# EAGLE board Modul relay print (EAGLE 7.6.0), part 1 of 2
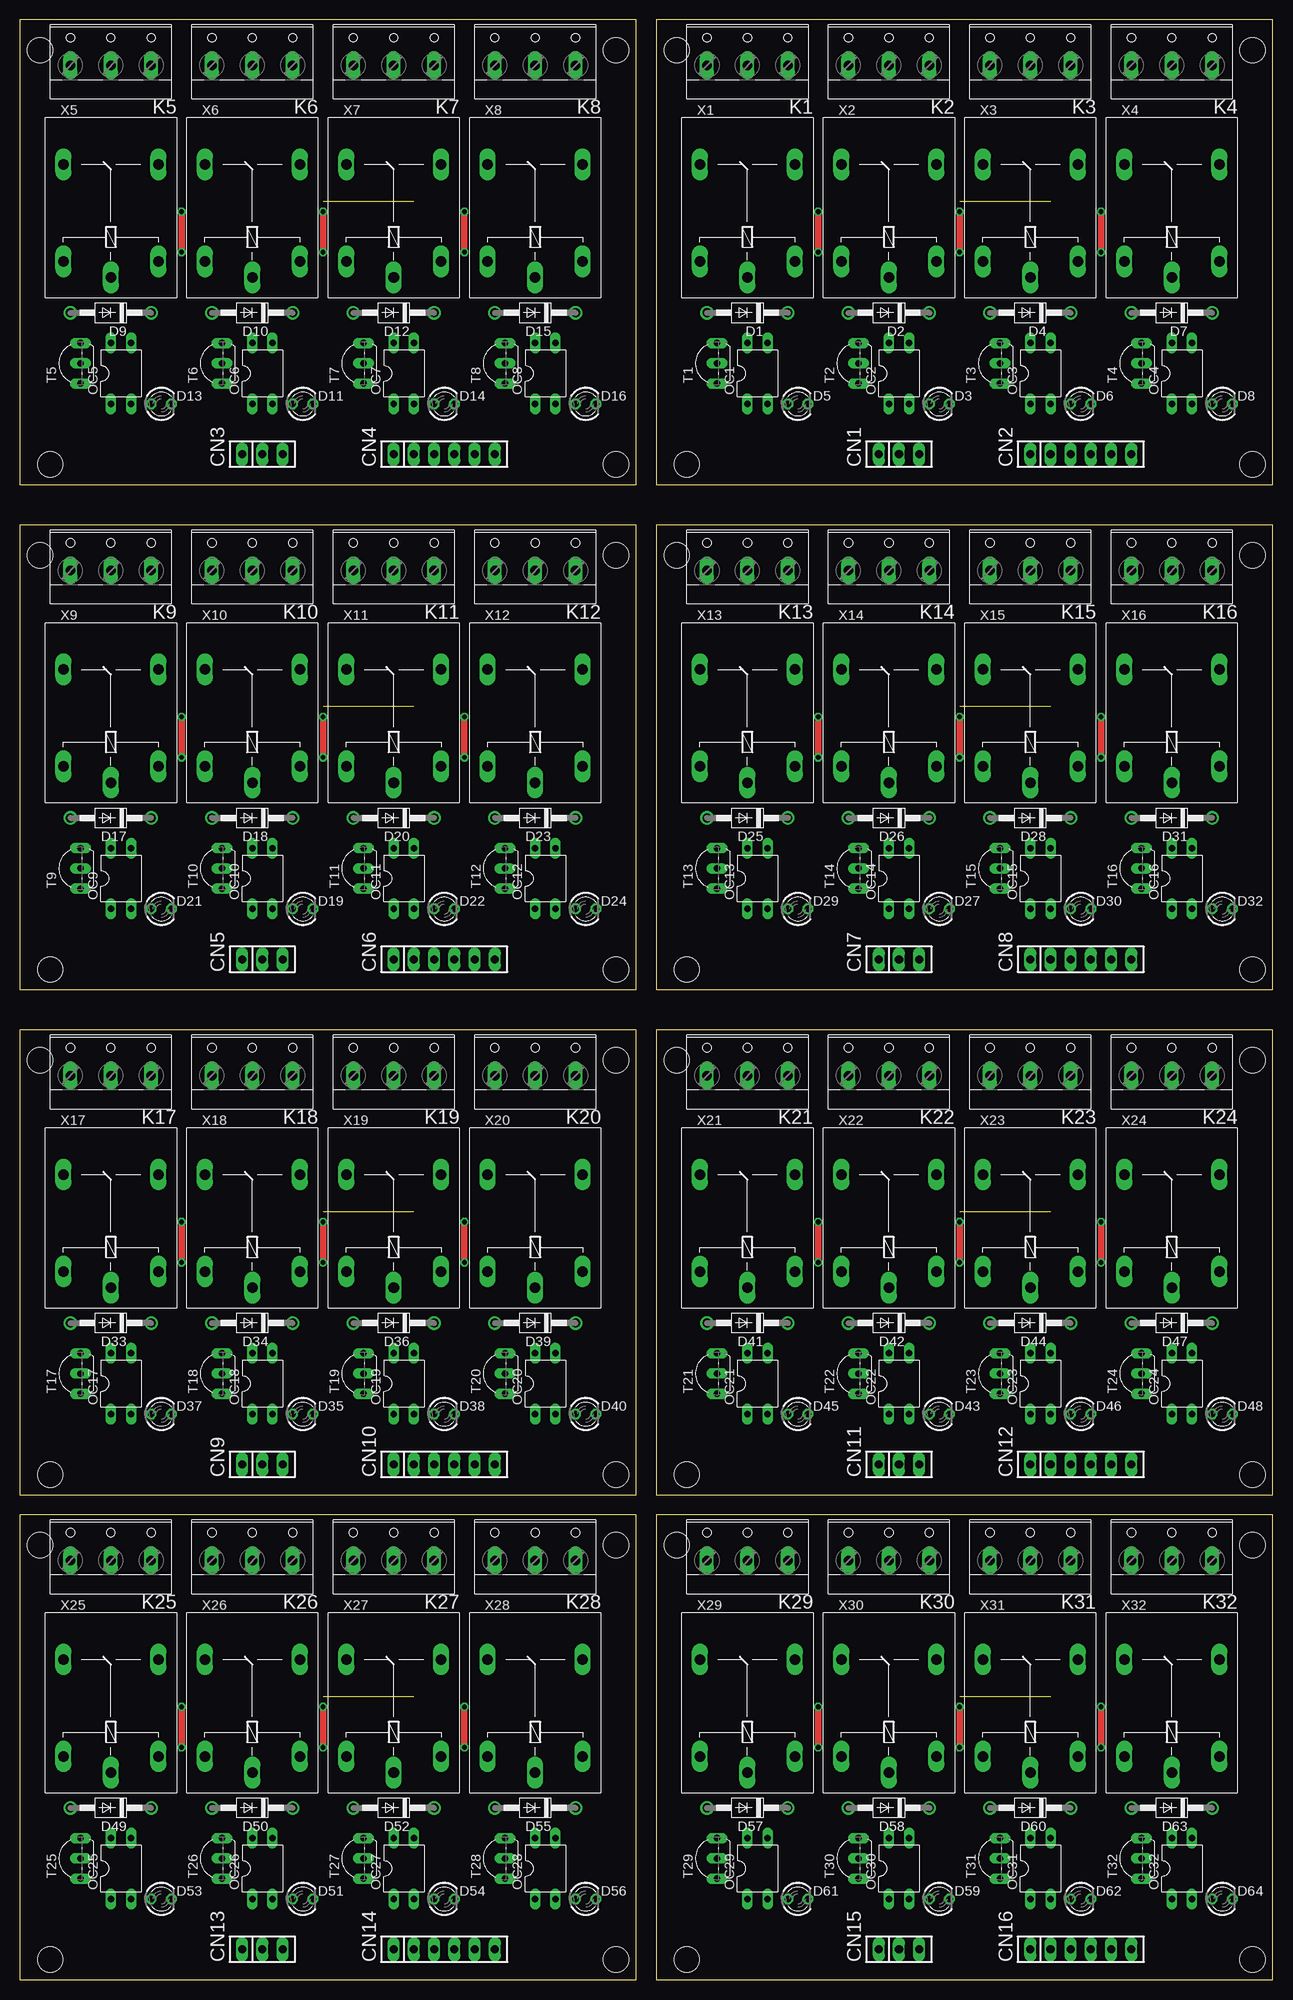
[diagram p0: board, top side]
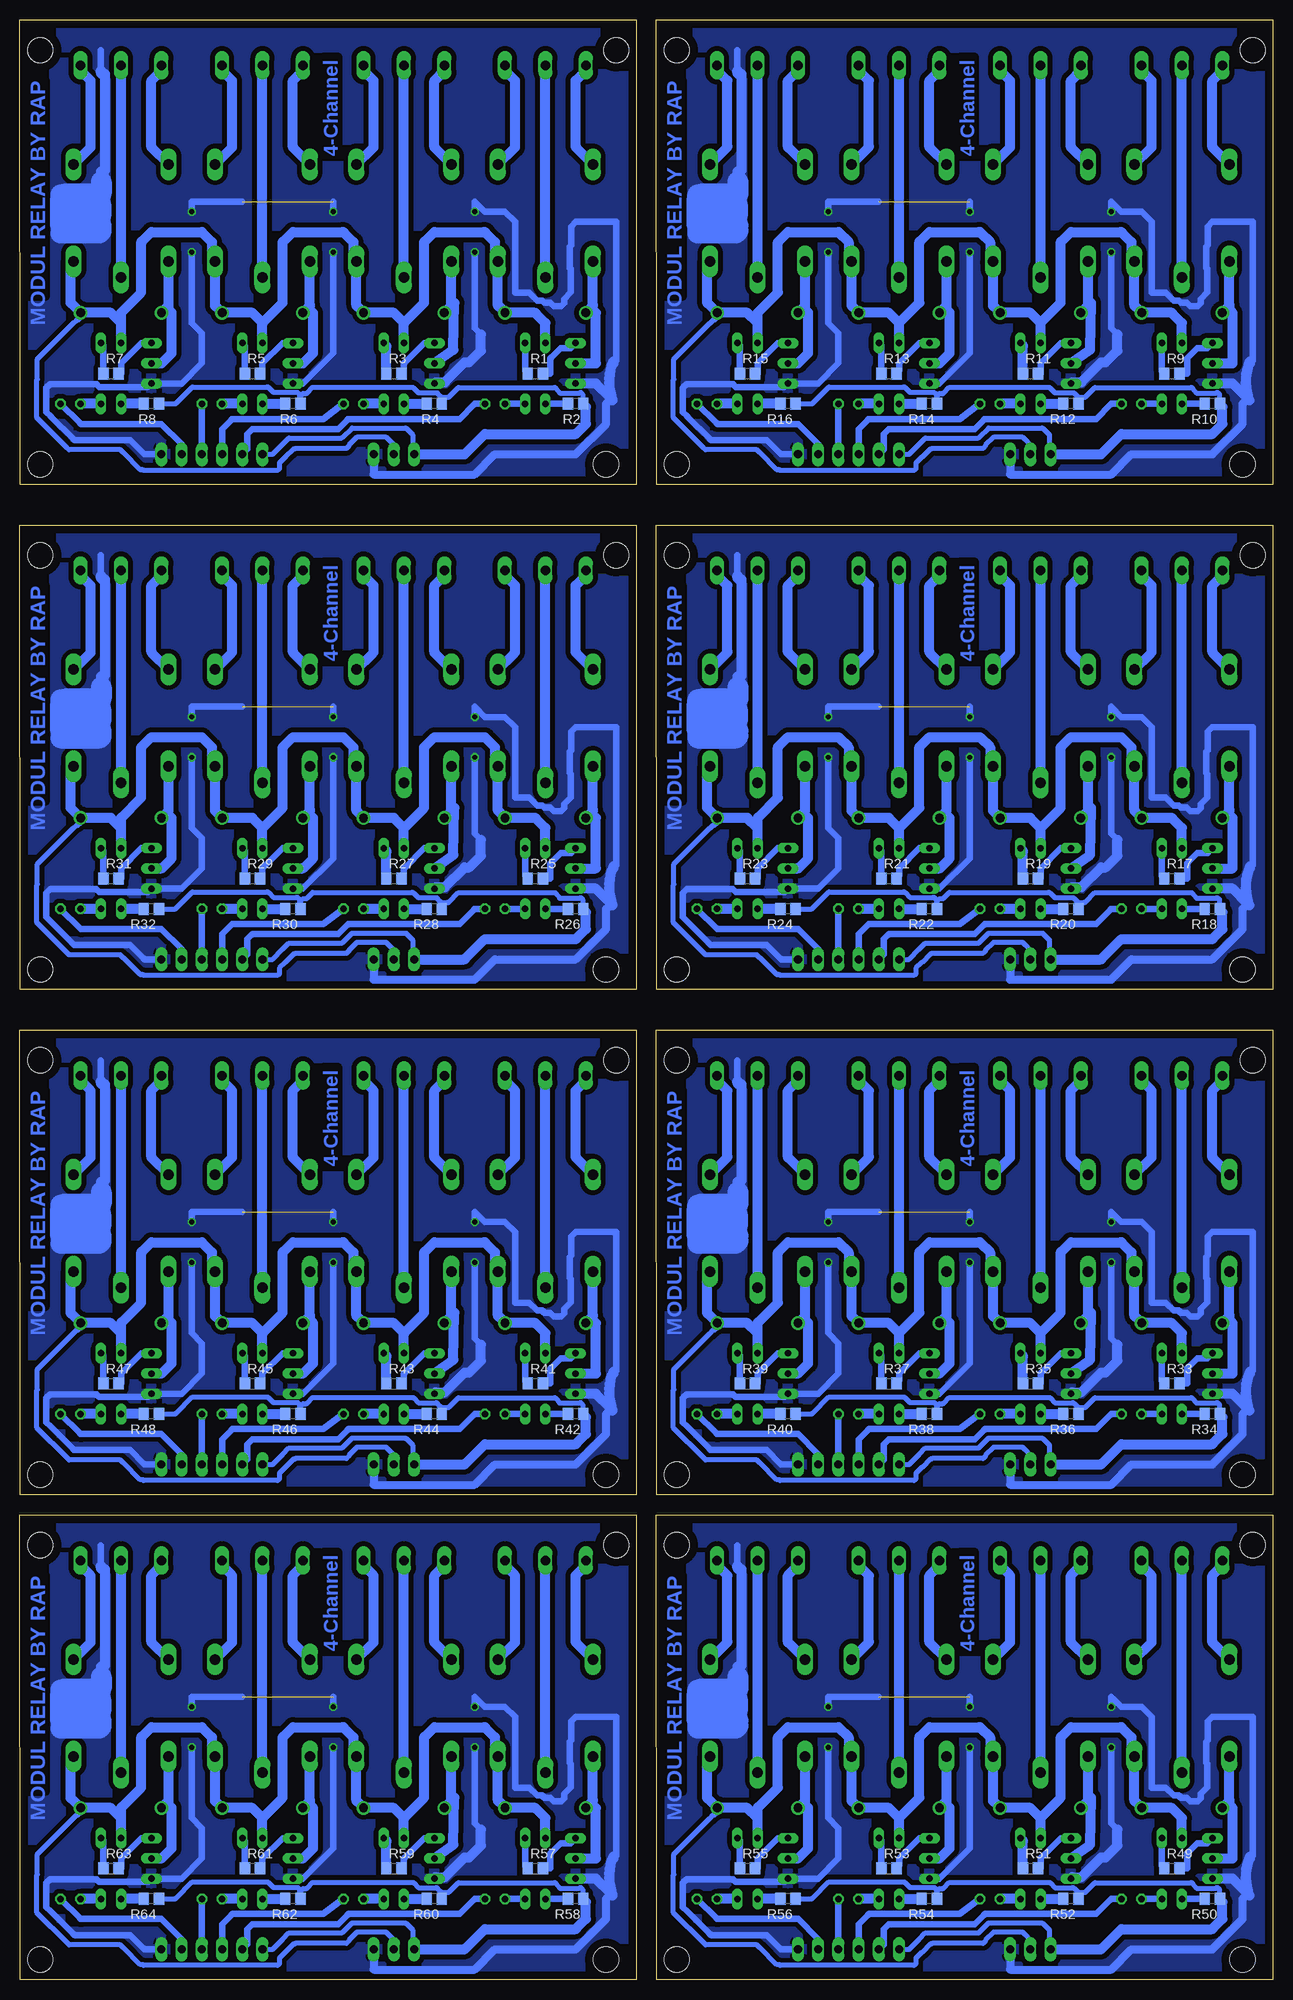
[diagram p1: board, bottom side, seen from below]

Size 157.49 x 246.38 mm. Coordinates in mm from the lower left corner, seen from the top.
Outline: 80.01,187.96 157.46,187.96 157.49,246.38 80.01,246.38 80.01,187.96
Outline: 0,187.96 77.45,187.96 77.48,246.38 0,246.38 0,187.96
Outline: 0,124.46 77.45,124.46 77.48,182.88 0,182.88 0,124.46
Outline: 80.01,124.46 157.46,124.46 157.49,182.88 80.01,182.88 80.01,124.46
Outline: 0,60.96 77.45,60.96 77.48,119.38 0,119.38 0,60.96
Outline: 80.01,60.96 157.46,60.96 157.49,119.38 80.01,119.38 80.01,60.96
Outline: 0,0 77.45,0 77.48,58.42 0,58.42 0,0
Outline: 80.01,0 157.46,0 157.49,58.42 80.01,58.42 80.01,0
Copper layers (1*16): Top 0.035mm / dielectric 1.5mm / Bottom 0.035mm
Design rules "default": minimum track width 10mil, minimum drill 24mil, track to track 8mil, track to pad 8mil, pad to pad 8mil, via to via 8mil, smd to smd 8mil, copper to edge 40mil, drill to drill 8mil, minimum pad ring 10mil, minimum via ring 8mil, stop-mask expansion 4mil, vias tented up to drill 0mil, thermal gap 10mil
Holes 3.2 mm at 83.82,190.5 154.94,190.5 82.55,242.57 154.94,242.57 3.81,190.5 74.93,190.5 2.54,242.57 74.93,242.57 3.81,127 74.93,127 2.54,179.07 74.93,179.07 83.82,127 154.94,127 82.55,179.07 154.94,179.07 3.81,63.5 74.93,63.5 2.54,115.57 74.93,115.57 83.82,63.5 154.94,63.5 82.55,115.57 154.94,115.57 3.81,2.54 74.93,2.54 2.54,54.61 74.93,54.61 83.82,2.54 154.94,2.54 82.55,54.61 154.94,54.61

## Footprints (pad centres in the part's own frame; a part is rotated, then mirrored left to right if it is on the bottom)
SIP-100-3V = drill 1.016 long: 1 -2.54,0; 2 0,0; 3 2.54,0
SIP-100-6V = drill 1.016 long: 1 -6.35,0; 2 -3.81,0; 3 -1.27,0; 4 1.27,0; 5 3.81,0; 6 6.35,0
DO41-10 = drill 1.118: A 5.08,0; C -5.08,0
LED3MM = drill 0.813 octagon: A -1.27,0; K 1.27,0
G5LE = drill 1.321 long: 1 -7.493,-5.969; 2 -7.493,5.969; O 4.699,5.969; P -9.525,0; S 4.699,-5.969
DIL04 = drill 0.813 long: 1 -1.27,-3.81; 2 1.27,-3.81; 3 1.27,3.81; 4 -1.27,3.81
R0805 = smd 1.3 x 1.5: 1 -0.95,0; 2 0.95,0
TO92-ECB = drill 0.813 long: B 2.54,0; C 0,0; E -2.54,0
W237-3E = drill 1.194 long: 1 -5.08,-0.635; 2 0,-0.635; 3 5.08,-0.635

## Placement (x,y rotation side)
CN1  [SIP-100-3V]  110.49,191.77 0 top
CN2  [SIP-100-6V]  133.35,191.77 0 top
CN3  [SIP-100-3V]  30.48,191.77 0 top
CN4  [SIP-100-6V]  53.34,191.77 0 top
CN5  [SIP-100-3V]  30.48,128.27 0 top
CN6  [SIP-100-6V]  53.34,128.27 0 top
CN7  [SIP-100-3V]  110.49,128.27 0 top
CN8  [SIP-100-6V]  133.35,128.27 0 top
CN9  [SIP-100-3V]  30.48,64.77 0 top
CN10  [SIP-100-6V]  53.34,64.77 0 top
CN11  [SIP-100-3V]  110.49,64.77 0 top
CN12  [SIP-100-6V]  133.35,64.77 0 top
CN13  [SIP-100-3V]  30.48,3.81 0 top
CN14  [SIP-100-6V]  53.34,3.81 0 top
CN15  [SIP-100-3V]  110.49,3.81 0 top
CN16  [SIP-100-6V]  133.35,3.81 0 top
D1  1N4004  [DO41-10]  91.44,209.55 180 top
D2  1N4004  [DO41-10]  109.22,209.55 180 top
D3  [LED3MM]  115.57,198.12 0 top
D4  1N4004  [DO41-10]  127,209.55 180 top
D5  [LED3MM]  97.79,198.12 0 top
D6  [LED3MM]  133.35,198.12 0 top
D7  1N4004  [DO41-10]  144.78,209.55 180 top
D8  [LED3MM]  151.13,198.12 0 top
D9  1N4004  [DO41-10]  11.43,209.55 180 top
D10  1N4004  [DO41-10]  29.21,209.55 180 top
D11  [LED3MM]  35.56,198.12 0 top
D12  1N4004  [DO41-10]  46.99,209.55 180 top
D13  [LED3MM]  17.78,198.12 0 top
D14  [LED3MM]  53.34,198.12 0 top
D15  1N4004  [DO41-10]  64.77,209.55 180 top
D16  [LED3MM]  71.12,198.12 0 top
D17  1N4004  [DO41-10]  11.43,146.05 180 top
D18  1N4004  [DO41-10]  29.21,146.05 180 top
D19  [LED3MM]  35.56,134.62 0 top
D20  1N4004  [DO41-10]  46.99,146.05 180 top
D21  [LED3MM]  17.78,134.62 0 top
D22  [LED3MM]  53.34,134.62 0 top
D23  1N4004  [DO41-10]  64.77,146.05 180 top
D24  [LED3MM]  71.12,134.62 0 top
D25  1N4004  [DO41-10]  91.44,146.05 180 top
D26  1N4004  [DO41-10]  109.22,146.05 180 top
D27  [LED3MM]  115.57,134.62 0 top
D28  1N4004  [DO41-10]  127,146.05 180 top
D29  [LED3MM]  97.79,134.62 0 top
D30  [LED3MM]  133.35,134.62 0 top
D31  1N4004  [DO41-10]  144.78,146.05 180 top
D32  [LED3MM]  151.13,134.62 0 top
D33  1N4004  [DO41-10]  11.43,82.55 180 top
D34  1N4004  [DO41-10]  29.21,82.55 180 top
D35  [LED3MM]  35.56,71.12 0 top
D36  1N4004  [DO41-10]  46.99,82.55 180 top
D37  [LED3MM]  17.78,71.12 0 top
D38  [LED3MM]  53.34,71.12 0 top
D39  1N4004  [DO41-10]  64.77,82.55 180 top
D40  [LED3MM]  71.12,71.12 0 top
D41  1N4004  [DO41-10]  91.44,82.55 180 top
D42  1N4004  [DO41-10]  109.22,82.55 180 top
D43  [LED3MM]  115.57,71.12 0 top
D44  1N4004  [DO41-10]  127,82.55 180 top
D45  [LED3MM]  97.79,71.12 0 top
D46  [LED3MM]  133.35,71.12 0 top
D47  1N4004  [DO41-10]  144.78,82.55 180 top
D48  [LED3MM]  151.13,71.12 0 top
D49  1N4004  [DO41-10]  11.43,21.59 180 top
D50  1N4004  [DO41-10]  29.21,21.59 180 top
D51  [LED3MM]  35.56,10.16 0 top
D52  1N4004  [DO41-10]  46.99,21.59 180 top
D53  [LED3MM]  17.78,10.16 0 top
D54  [LED3MM]  53.34,10.16 0 top
D55  1N4004  [DO41-10]  64.77,21.59 180 top
D56  [LED3MM]  71.12,10.16 0 top
D57  1N4004  [DO41-10]  91.44,21.59 180 top
D58  1N4004  [DO41-10]  109.22,21.59 180 top
D59  [LED3MM]  115.57,10.16 0 top
D60  1N4004  [DO41-10]  127,21.59 180 top
D61  [LED3MM]  97.79,10.16 0 top
D62  [LED3MM]  133.35,10.16 0 top
D63  1N4004  [DO41-10]  144.78,21.59 180 top
D64  [LED3MM]  151.13,10.16 0 top
K1  G5L  [G5LE]  91.44,223.52 90 top
K2  G5L  [G5LE]  109.22,223.52 90 top
K3  G5L  [G5LE]  127,223.52 90 top
K4  G5L  [G5LE]  144.78,223.52 90 top
K5  G5L  [G5LE]  11.43,223.52 90 top
K6  G5L  [G5LE]  29.21,223.52 90 top
K7  G5L  [G5LE]  46.99,223.52 90 top
K8  G5L  [G5LE]  64.77,223.52 90 top
K9  G5L  [G5LE]  11.43,160.02 90 top
K10  G5L  [G5LE]  29.21,160.02 90 top
K11  G5L  [G5LE]  46.99,160.02 90 top
K12  G5L  [G5LE]  64.77,160.02 90 top
K13  G5L  [G5LE]  91.44,160.02 90 top
K14  G5L  [G5LE]  109.22,160.02 90 top
K15  G5L  [G5LE]  127,160.02 90 top
K16  G5L  [G5LE]  144.78,160.02 90 top
K17  G5L  [G5LE]  11.43,96.52 90 top
K18  G5L  [G5LE]  29.21,96.52 90 top
K19  G5L  [G5LE]  46.99,96.52 90 top
K20  G5L  [G5LE]  64.77,96.52 90 top
K21  G5L  [G5LE]  91.44,96.52 90 top
K22  G5L  [G5LE]  109.22,96.52 90 top
K23  G5L  [G5LE]  127,96.52 90 top
K24  G5L  [G5LE]  144.78,96.52 90 top
K25  G5L  [G5LE]  11.43,35.56 90 top
K26  G5L  [G5LE]  29.21,35.56 90 top
K27  G5L  [G5LE]  46.99,35.56 90 top
K28  G5L  [G5LE]  64.77,35.56 90 top
K29  G5L  [G5LE]  91.44,35.56 90 top
K30  G5L  [G5LE]  109.22,35.56 90 top
K31  G5L  [G5LE]  127,35.56 90 top
K32  G5L  [G5LE]  144.78,35.56 90 top
OC1  [DIL04]  92.71,201.93 0 top
OC2  [DIL04]  110.49,201.93 0 top
OC3  [DIL04]  128.27,201.93 0 top
OC4  [DIL04]  146.05,201.93 0 top
OC5  [DIL04]  12.7,201.93 0 top
OC6  [DIL04]  30.48,201.93 0 top
OC7  [DIL04]  48.26,201.93 0 top
OC8  [DIL04]  66.04,201.93 0 top
OC9  [DIL04]  12.7,138.43 0 top
OC10  [DIL04]  30.48,138.43 0 top
OC11  [DIL04]  48.26,138.43 0 top
OC12  [DIL04]  66.04,138.43 0 top
OC13  [DIL04]  92.71,138.43 0 top
OC14  [DIL04]  110.49,138.43 0 top
OC15  [DIL04]  128.27,138.43 0 top
OC16  [DIL04]  146.05,138.43 0 top
OC17  [DIL04]  12.7,74.93 0 top
OC18  [DIL04]  30.48,74.93 0 top
OC19  [DIL04]  48.26,74.93 0 top
OC20  [DIL04]  66.04,74.93 0 top
OC21  [DIL04]  92.71,74.93 0 top
OC22  [DIL04]  110.49,74.93 0 top
OC23  [DIL04]  128.27,74.93 0 top
OC24  [DIL04]  146.05,74.93 0 top
OC25  [DIL04]  12.7,13.97 0 top
OC26  [DIL04]  30.48,13.97 0 top
OC27  [DIL04]  48.26,13.97 0 top
OC28  [DIL04]  66.04,13.97 0 top
OC29  [DIL04]  92.71,13.97 0 top
OC30  [DIL04]  110.49,13.97 0 top
OC31  [DIL04]  128.27,13.97 0 top
OC32  [DIL04]  146.05,13.97 0 top
R1  [R0805]  92.71,201.93 0 bottom
R2  [R0805]  87.63,198.12 180 bottom
R3  [R0805]  110.49,201.93 0 bottom
R4  [R0805]  105.41,198.12 180 bottom
R5  [R0805]  128.27,201.93 0 bottom
R6  [R0805]  123.19,198.12 180 bottom
R7  [R0805]  146.05,201.93 0 bottom
R8  [R0805]  140.97,198.12 180 bottom
R9  [R0805]  12.7,201.93 0 bottom
R10  [R0805]  7.62,198.12 180 bottom
R11  [R0805]  30.48,201.93 0 bottom
R12  [R0805]  25.4,198.12 180 bottom
R13  [R0805]  48.26,201.93 0 bottom
R14  [R0805]  43.18,198.12 180 bottom
R15  [R0805]  66.04,201.93 0 bottom
R16  [R0805]  60.96,198.12 180 bottom
R17  [R0805]  12.7,138.43 0 bottom
R18  [R0805]  7.62,134.62 180 bottom
R19  [R0805]  30.48,138.43 0 bottom
R20  [R0805]  25.4,134.62 180 bottom
R21  [R0805]  48.26,138.43 0 bottom
R22  [R0805]  43.18,134.62 180 bottom
R23  [R0805]  66.04,138.43 0 bottom
R24  [R0805]  60.96,134.62 180 bottom
R25  [R0805]  92.71,138.43 0 bottom
R26  [R0805]  87.63,134.62 180 bottom
R27  [R0805]  110.49,138.43 0 bottom
R28  [R0805]  105.41,134.62 180 bottom
R29  [R0805]  128.27,138.43 0 bottom
R30  [R0805]  123.19,134.62 180 bottom
R31  [R0805]  146.05,138.43 0 bottom
R32  [R0805]  140.97,134.62 180 bottom
R33  [R0805]  12.7,74.93 0 bottom
R34  [R0805]  7.62,71.12 180 bottom
R35  [R0805]  30.48,74.93 0 bottom
R36  [R0805]  25.4,71.12 180 bottom
R37  [R0805]  48.26,74.93 0 bottom
R38  [R0805]  43.18,71.12 180 bottom
R39  [R0805]  66.04,74.93 0 bottom
R40  [R0805]  60.96,71.12 180 bottom
R41  [R0805]  92.71,74.93 0 bottom
R42  [R0805]  87.63,71.12 180 bottom
R43  [R0805]  110.49,74.93 0 bottom
R44  [R0805]  105.41,71.12 180 bottom
R45  [R0805]  128.27,74.93 0 bottom
R46  [R0805]  123.19,71.12 180 bottom
R47  [R0805]  146.05,74.93 0 bottom
R48  [R0805]  140.97,71.12 180 bottom
R49  [R0805]  12.7,13.97 0 bottom
R50  [R0805]  7.62,10.16 180 bottom
R51  [R0805]  30.48,13.97 0 bottom
R52  [R0805]  25.4,10.16 180 bottom
R53  [R0805]  48.26,13.97 0 bottom
R54  [R0805]  43.18,10.16 180 bottom
R55  [R0805]  66.04,13.97 0 bottom
R56  [R0805]  60.96,10.16 180 bottom
R57  [R0805]  92.71,13.97 0 bottom
R58  [R0805]  87.63,10.16 180 bottom
R59  [R0805]  110.49,13.97 0 bottom
R60  [R0805]  105.41,10.16 180 bottom
R61  [R0805]  128.27,13.97 0 bottom
R62  [R0805]  123.19,10.16 180 bottom
R63  [R0805]  146.05,13.97 0 bottom
R64  [R0805]  140.97,10.16 180 bottom
T1  [TO92-ECB]  87.63,203.2 90 top
T2  [TO92-ECB]  105.41,203.2 90 top
T3  [TO92-ECB]  123.19,203.2 90 top
T4  [TO92-ECB]  140.97,203.2 90 top
T5  [TO92-ECB]  7.62,203.2 90 top
T6  [TO92-ECB]  25.4,203.2 90 top
T7  [TO92-ECB]  43.18,203.2 90 top
T8  [TO92-ECB]  60.96,203.2 90 top
T9  [TO92-ECB]  7.62,139.7 90 top
T10  [TO92-ECB]  25.4,139.7 90 top
T11  [TO92-ECB]  43.18,139.7 90 top
T12  [TO92-ECB]  60.96,139.7 90 top
T13  [TO92-ECB]  87.63,139.7 90 top
T14  [TO92-ECB]  105.41,139.7 90 top
T15  [TO92-ECB]  123.19,139.7 90 top
T16  [TO92-ECB]  140.97,139.7 90 top
T17  [TO92-ECB]  7.62,76.2 90 top
T18  [TO92-ECB]  25.4,76.2 90 top
T19  [TO92-ECB]  43.18,76.2 90 top
T20  [TO92-ECB]  60.96,76.2 90 top
T21  [TO92-ECB]  87.63,76.2 90 top
T22  [TO92-ECB]  105.41,76.2 90 top
T23  [TO92-ECB]  123.19,76.2 90 top
T24  [TO92-ECB]  140.97,76.2 90 top
T25  [TO92-ECB]  7.62,15.24 90 top
T26  [TO92-ECB]  25.4,15.24 90 top
T27  [TO92-ECB]  43.18,15.24 90 top
T28  [TO92-ECB]  60.96,15.24 90 top
T29  [TO92-ECB]  87.63,15.24 90 top
T30  [TO92-ECB]  105.41,15.24 90 top
T31  [TO92-ECB]  123.19,15.24 90 top
T32  [TO92-ECB]  140.97,15.24 90 top
X1  [W237-3E]  91.44,241.3 0 top
X2  [W237-3E]  109.22,241.3 0 top
X3  [W237-3E]  127,241.3 0 top
X4  [W237-3E]  144.78,241.3 0 top
X5  [W237-3E]  11.43,241.3 0 top
X6  [W237-3E]  29.21,241.3 0 top
X7  [W237-3E]  46.99,241.3 0 top
X8  [W237-3E]  64.77,241.3 0 top
X9  [W237-3E]  11.43,177.8 0 top
X10  [W237-3E]  29.21,177.8 0 top
X11  [W237-3E]  46.99,177.8 0 top
X12  [W237-3E]  64.77,177.8 0 top
X13  [W237-3E]  91.44,177.8 0 top
X14  [W237-3E]  109.22,177.8 0 top
X15  [W237-3E]  127,177.8 0 top
X16  [W237-3E]  144.78,177.8 0 top
X17  [W237-3E]  11.43,114.3 0 top
X18  [W237-3E]  29.21,114.3 0 top
X19  [W237-3E]  46.99,114.3 0 top
X20  [W237-3E]  64.77,114.3 0 top
X21  [W237-3E]  91.44,114.3 0 top
X22  [W237-3E]  109.22,114.3 0 top
X23  [W237-3E]  127,114.3 0 top
X24  [W237-3E]  144.78,114.3 0 top
X25  [W237-3E]  11.43,53.34 0 top
X26  [W237-3E]  29.21,53.34 0 top
X27  [W237-3E]  46.99,53.34 0 top
X28  [W237-3E]  64.77,53.34 0 top
X29  [W237-3E]  91.44,53.34 0 top
X30  [W237-3E]  109.22,53.34 0 top
X31  [W237-3E]  127,53.34 0 top
X32  [W237-3E]  144.78,53.34 0 top

## Library data of the parts
CN1-CN16 = con-hdrs40
D1 D2 D4 D7 D9 D10 D12 D15 D17 D18 D20 D23 D25 D26 D28 D31 D33 D34 D36 D39 D41 D42 D44 D47 D49 D50 D52 D55 D57 D58 D60 D63 = diode
D3 D5 D6 D8 D11 D13 D14 D16 D19 D21 D22 D24 D27 D29 D30 D32 D35 D37 D38 D40 D43 D45 D46 D48 D51 D53 D54 D56 D59 D61 D62 D64 = led
K1-K32 = relay; OC_FARNELL: unknown; OC_NEWARK: unknown
OC1-OC32 = optocoupler
R1-R64 = rcl
T1-T32 = transistor
X1-X32 = con-wago-508; OC_FARNELL: unknown; OC_NEWARK: unknown

## Nets
COM: K1.P X1.2
COM1: K5.P X5.2
COM2: K9.P X9.2
COM3: K13.P X13.2
COM4: K17.P X17.2
COM5: K21.P X21.2
COM6: K25.P X25.2
COM7: K29.P X29.2
COM_1: K2.P X2.2
COM_2: K3.P X3.2
COM_3: K4.P X4.2
COM_4: K6.P X6.2
COM_5: K7.P X7.2
COM_6: K8.P X8.2
COM_7: K10.P X10.2
COM_8: K11.P X11.2
COM_9: K12.P X12.2
COM_10: K14.P X14.2
COM_11: K15.P X15.2
COM_12: K16.P X16.2
COM_13: K18.P X18.2
COM_14: K19.P X19.2
COM_15: K20.P X20.2
COM_16: K22.P X22.2
COM_17: K23.P X23.2
COM_18: K24.P X24.2
COM_19: K26.P X26.2
COM_20: K27.P X27.2
COM_21: K28.P X28.2
COM_22: K30.P X30.2
COM_23: K31.P X31.2
COM_24: K32.P X32.2
GND: CN1.3 CN2.6 T1.E T2.E T3.E T4.E
GND1: CN3.3 CN4.6 T5.E T6.E T7.E T8.E
GND2: CN5.3 CN6.6 T9.E T10.E T11.E T12.E
GND3: CN7.3 CN8.6 T13.E T14.E T15.E T16.E
GND4: CN9.3 CN10.6 T17.E T18.E T19.E T20.E
GND5: CN11.3 CN12.6 T21.E T22.E T23.E T24.E
GND6: CN13.3 CN14.6 T25.E T26.E T27.E T28.E
GND7: CN15.3 CN16.6 T29.E T30.E T31.E T32.E
IN-1: CN2.2 D5.K
IN-2: CN2.3 D3.K
IN-3: CN2.4 D6.K
IN-4: CN2.5 D8.K
IN-5: CN4.2 D13.K
IN-6: CN4.3 D11.K
IN-7: CN4.4 D14.K
IN-8: CN4.5 D16.K
IN-9: CN6.2 D21.K
IN-10: CN6.3 D19.K
IN-11: CN6.4 D22.K
IN-12: CN6.5 D24.K
IN-13: CN8.2 D29.K
IN-14: CN8.3 D27.K
IN-15: CN8.4 D30.K
IN-16: CN8.5 D32.K
IN-17: CN10.2 D37.K
IN-18: CN10.3 D35.K
IN-19: CN10.4 D38.K
IN-20: CN10.5 D40.K
IN-21: CN12.2 D45.K
IN-22: CN12.3 D43.K
IN-23: CN12.4 D46.K
IN-24: CN12.5 D48.K
IN-25: CN14.2 D53.K
IN-26: CN14.3 D51.K
IN-27: CN14.4 D54.K
IN-28: CN14.5 D56.K
IN-29: CN16.2 D61.K
IN-30: CN16.3 D59.K
IN-31: CN16.4 D62.K
IN-32: CN16.5 D64.K
JD-VCC: CN1.2 D1.C D2.C D4.C D7.C K1.1 K2.1 K3.1 K4.1 OC1.4 OC2.4 OC3.4 OC4.4
JD-VCC1: CN3.2 D9.C D10.C D12.C D15.C K5.1 K6.1 K7.1 K8.1 OC5.4 OC6.4 OC7.4 OC8.4
JD-VCC2: CN5.2 D17.C D18.C D20.C D23.C K9.1 K10.1 K11.1 K12.1 OC9.4 OC10.4 OC11.4 OC12.4
JD-VCC3: CN7.2 D25.C D26.C D28.C D31.C K13.1 K14.1 K15.1 K16.1 OC13.4 OC14.4 OC15.4 OC16.4
JD-VCC4: CN9.2 D33.C D34.C D36.C D39.C K17.1 K18.1 K19.1 K20.1 OC17.4 OC18.4 OC19.4 OC20.4
JD-VCC5: CN11.2 D41.C D42.C D44.C D47.C K21.1 K22.1 K23.1 K24.1 OC21.4 OC22.4 OC23.4 OC24.4
JD-VCC6: CN13.2 D49.C D50.C D52.C D55.C K25.1 K26.1 K27.1 K28.1 OC25.4 OC26.4 OC27.4 OC28.4
JD-VCC7: CN15.2 D57.C D58.C D60.C D63.C K29.1 K30.1 K31.1 K32.1 OC29.4 OC30.4 OC31.4 OC32.4
N$1: D2.A K2.2 T2.C
N$2: D1.A K1.2 T1.C
N$3: OC1.1 R2.2
N$4: R3.2 T2.B
N$5: OC2.3 R3.1
N$6: D3.A OC2.2
N$7: OC2.1 R4.2
N$8: D4.A K3.2 T3.C
N$9: R1.2 T1.B
N$10: OC1.3 R1.1
N$11: D5.A OC1.2
N$12: R5.2 T3.B
N$13: OC3.3 R5.1
N$14: D6.A OC3.2
N$15: OC3.1 R6.2
N$16: D7.A K4.2 T4.C
N$17: R7.2 T4.B
N$18: OC4.3 R7.1
N$19: D8.A OC4.2
N$20: OC4.1 R8.2
N$21: D9.A K5.2 T5.C
N$22: R9.2 T5.B
N$23: OC5.3 R9.1
N$24: D13.A OC5.2
N$25: OC5.1 R10.2
N$26: D10.A K6.2 T6.C
N$27: R11.2 T6.B
N$28: OC6.3 R11.1
N$29: D11.A OC6.2
N$30: OC6.1 R12.2
N$31: D12.A K7.2 T7.C
N$32: R13.2 T7.B
N$33: OC7.3 R13.1
N$34: D14.A OC7.2
N$35: OC7.1 R14.2
N$36: D15.A K8.2 T8.C
N$37: R15.2 T8.B
N$38: OC8.3 R15.1
N$39: D16.A OC8.2
N$40: OC8.1 R16.2
N$41: D17.A K9.2 T9.C
N$42: R17.2 T9.B
N$43: OC9.3 R17.1
N$44: D21.A OC9.2
N$45: OC9.1 R18.2
N$46: D18.A K10.2 T10.C
N$47: R19.2 T10.B
N$48: OC10.3 R19.1
N$49: D19.A OC10.2
N$50: OC10.1 R20.2
N$51: D20.A K11.2 T11.C
N$52: R21.2 T11.B
N$53: OC11.3 R21.1
N$54: D22.A OC11.2
N$55: OC11.1 R22.2
N$56: D23.A K12.2 T12.C
N$57: R23.2 T12.B
N$58: OC12.3 R23.1
N$59: D24.A OC12.2
N$60: OC12.1 R24.2
N$61: D25.A K13.2 T13.C
N$62: R25.2 T13.B
N$63: OC13.3 R25.1
N$64: D29.A OC13.2
N$65: OC13.1 R26.2
N$66: D26.A K14.2 T14.C
N$67: R27.2 T14.B
N$68: OC14.3 R27.1
N$69: D27.A OC14.2
N$70: OC14.1 R28.2
N$71: D28.A K15.2 T15.C
N$72: R29.2 T15.B
N$73: OC15.3 R29.1
N$74: D30.A OC15.2
N$75: OC15.1 R30.2
N$76: D31.A K16.2 T16.C
N$77: R31.2 T16.B
N$78: OC16.3 R31.1
N$79: D32.A OC16.2
N$80: OC16.1 R32.2
N$81: D33.A K17.2 T17.C
N$82: R33.2 T17.B
N$83: OC17.3 R33.1
N$84: D37.A OC17.2
N$85: OC17.1 R34.2
N$86: D34.A K18.2 T18.C
N$87: R35.2 T18.B
N$88: OC18.3 R35.1
N$89: D35.A OC18.2
N$90: OC18.1 R36.2
N$91: D36.A K19.2 T19.C
N$92: R37.2 T19.B
N$93: OC19.3 R37.1
N$94: D38.A OC19.2
N$95: OC19.1 R38.2
N$96: D39.A K20.2 T20.C
N$97: R39.2 T20.B
N$98: OC20.3 R39.1
N$99: D40.A OC20.2
N$100: OC20.1 R40.2
N$101: D41.A K21.2 T21.C
N$102: R41.2 T21.B
N$103: OC21.3 R41.1
N$104: D45.A OC21.2
N$105: OC21.1 R42.2
N$106: D42.A K22.2 T22.C
N$107: R43.2 T22.B
N$108: OC22.3 R43.1
N$109: D43.A OC22.2
N$110: OC22.1 R44.2
N$111: D44.A K23.2 T23.C
N$112: R45.2 T23.B
N$113: OC23.3 R45.1
N$114: D46.A OC23.2
N$115: OC23.1 R46.2
N$116: D47.A K24.2 T24.C
N$117: R47.2 T24.B
N$118: OC24.3 R47.1
N$119: D48.A OC24.2
N$120: OC24.1 R48.2
N$121: D49.A K25.2 T25.C
N$122: R49.2 T25.B
N$123: OC25.3 R49.1
N$124: D53.A OC25.2
N$125: OC25.1 R50.2
N$126: D50.A K26.2 T26.C
N$127: R51.2 T26.B
N$128: OC26.3 R51.1
N$129: D51.A OC26.2
N$130: OC26.1 R52.2
N$131: D52.A K27.2 T27.C
N$132: R53.2 T27.B
N$133: OC27.3 R53.1
N$134: D54.A OC27.2
N$135: OC27.1 R54.2
N$136: D55.A K28.2 T28.C
N$137: R55.2 T28.B
N$138: OC28.3 R55.1
N$139: D56.A OC28.2
N$140: OC28.1 R56.2
N$141: D57.A K29.2 T29.C
N$142: R57.2 T29.B
N$143: OC29.3 R57.1
N$144: D61.A OC29.2
N$145: OC29.1 R58.2
N$146: D58.A K30.2 T30.C
N$147: R59.2 T30.B
N$148: OC30.3 R59.1
N$149: D59.A OC30.2
N$150: OC30.1 R60.2
N$151: D60.A K31.2 T31.C
N$152: R61.2 T31.B
N$153: OC31.3 R61.1
N$154: D62.A OC31.2
N$155: OC31.1 R62.2
N$156: D63.A K32.2 T32.C
N$157: R63.2 T32.B
N$158: OC32.3 R63.1
N$159: D64.A OC32.2
N$160: OC32.1 R64.2
NC: K1.O X1.1
NC1: K5.O X5.1
NC2: K9.O X9.1
NC3: K13.O X13.1
NC4: K17.O X17.1
NC5: K21.O X21.1
NC6: K25.O X25.1
NC7: K29.O X29.1
NC_1: K2.O X2.1
NC_2: K3.O X3.1
NC_3: K4.O X4.1
NC_4: K6.O X6.1
NC_5: K7.O X7.1
NC_6: K8.O X8.1
NC_7: K10.O X10.1
NC_8: K11.O X11.1
NC_9: K12.O X12.1
NC_10: K14.O X14.1
NC_11: K15.O X15.1
NC_12: K16.O X16.1
NC_13: K18.O X18.1
NC_14: K19.O X19.1
NC_15: K20.O X20.1
NC_16: K22.O X22.1
NC_17: K23.O X23.1
NC_18: K24.O X24.1
NC_19: K26.O X26.1
NC_20: K27.O X27.1
NC_21: K28.O X28.1
NC_22: K30.O X30.1
NC_23: K31.O X31.1
NC_24: K32.O X32.1
NO: K1.S X1.3
NO1: K5.S X5.3
NO2: K9.S X9.3
NO3: K13.S X13.3
NO4: K17.S X17.3
NO5: K21.S X21.3
NO6: K25.S X25.3
NO7: K29.S X29.3
NO_1: K2.S X2.3
NO_2: K3.S X3.3
NO_3: K4.S X4.3
NO_4: K6.S X6.3
NO_5: K7.S X7.3
NO_6: K8.S X8.3
NO_7: K10.S X10.3
NO_8: K11.S X11.3
NO_9: K12.S X12.3
NO_10: K14.S X14.3
NO_11: K15.S X15.3
NO_12: K16.S X16.3
NO_13: K18.S X18.3
NO_14: K19.S X19.3
NO_15: K20.S X20.3
NO_16: K22.S X22.3
NO_17: K23.S X23.3
NO_18: K24.S X24.3
NO_19: K26.S X26.3
NO_20: K27.S X27.3
NO_21: K28.S X28.3
NO_22: K30.S X30.3
NO_23: K31.S X31.3
NO_24: K32.S X32.3
VCC: CN1.1 CN2.1 R2.1 R4.1 R6.1 R8.1
VCC1: CN3.1 CN4.1 R10.1 R12.1 R14.1 R16.1
VCC2: CN5.1 CN6.1 R18.1 R20.1 R22.1 R24.1
VCC3: CN7.1 CN8.1 R26.1 R28.1 R30.1 R32.1
VCC4: CN9.1 CN10.1 R34.1 R36.1 R38.1 R40.1
VCC5: CN11.1 CN12.1 R42.1 R44.1 R46.1 R48.1
VCC6: CN13.1 CN14.1 R50.1 R52.1 R54.1 R56.1
VCC7: CN15.1 CN16.1 R58.1 R60.1 R62.1 R64.1

## Tracks (layer width: path | path; a pad name or v marks a point on that pad's centre or on a via)
COM
  Bottom 1.27: K1.P X1.2 91.44,241.3
COM1
  Bottom 1.27: K5.P X5.2 11.43,241.3
COM2
  Bottom 1.27: K9.P X9.2 11.43,177.8
COM3
  Bottom 1.27: K13.P X13.2 91.44,177.8
COM4
  Bottom 1.27: K17.P X17.2 11.43,114.3
COM5
  Bottom 1.27: K21.P X21.2 91.44,114.3
COM6
  Bottom 1.27: K25.P X25.2 11.43,53.34
COM7
  Bottom 1.27: K29.P X29.2 91.44,53.34
COM_1
  Bottom 1.27: K2.P X2.2
COM_2
  Bottom 1.27: K3.P X3.2
COM_3
  Bottom 1.27: K4.P X4.2 144.78,241.3
COM_4
  Bottom 1.27: K6.P X6.2
COM_5
  Bottom 1.27: K7.P X7.2
COM_6
  Bottom 1.27: K8.P X8.2 64.77,241.3
COM_7
  Bottom 1.27: K10.P X10.2
COM_8
  Bottom 1.27: K11.P X11.2
COM_9
  Bottom 1.27: K12.P X12.2 64.77,177.8
COM_10
  Bottom 1.27: K14.P X14.2
COM_11
  Bottom 1.27: K15.P X15.2
COM_12
  Bottom 1.27: K16.P X16.2 144.78,177.8
COM_13
  Bottom 1.27: K18.P X18.2
COM_14
  Bottom 1.27: K19.P X19.2
COM_15
  Bottom 1.27: K20.P X20.2 64.77,114.3
COM_16
  Bottom 1.27: K22.P X22.2
COM_17
  Bottom 1.27: K23.P X23.2
COM_18
  Bottom 1.27: K24.P X24.2 144.78,114.3
COM_19
  Bottom 1.27: K26.P X26.2
COM_20
  Bottom 1.27: K27.P X27.2
COM_21
  Bottom 1.27: K28.P X28.2 64.77,53.34
COM_22
  Bottom 1.27: K30.P X30.2
COM_23
  Bottom 1.27: K31.P X31.2
COM_24
  Bottom 1.27: K32.P X32.2 144.78,53.34
GND  (via drill 0.6)  (1 unrouted)
  Top 0.813: v100.33,217.17 v100.33,222.25 | v118.11,217.17 v118.11,222.25 | v135.89,217.17 v135.89,222.25
  Bottom 0.813: CN2.6 141.73,191.77 arc45 141.91,191.84 143.64,193.57 150.56,193.57 arc45 150.74,193.64 153.63,196.53 arc-45 153.63,196.53 154.19,197.09 154.19,200 arc45 154.11,200.18 153.69,200.6 148,200.6 arc45 147.82,200.53 147.52,200.23 141.5,200.23 arc-45 141.32,200.31 T4.E 137.16,200.66 134.62,203.2 134.62,207.01 135.89,208.28 v135.89,217.17 | 99.56,206.83 100.33,207.59 v100.33,217.17 | v100.33,222.25 100.33,223.52 99.06,222.25 96.52,222.25 95.25,220.98 95.25,212.09 93.45,212.09 92.47,211.11 91.86,211.11 91.58,210.83 90.84,210.83 90.42,210.4 89.46,210.4 89.09,210.77 89.09,211.29 88.27,212.12 88.27,215.07 88.39,215.19 88.39,217.86 88.21,218.05 88.21,220.41 87.63,220.98 82.55,220.98 82.55,203.56 82.91,203.2 | T3.E 121.92,200.66 118.11,204.47 v118.11,217.17 | v118.11,222.25 118.11,223.52 | v135.89,222.25 135.89,223.52 129.54,223.52 | 147.32,240.03 147.32,242.57 | 147.32,226.06 147.32,227.33
  Bottom 1.016: CN1.3 113.03,189.23 100.33,189.23 97.79,191.77 87.63,191.77 83.82,195.58 83.82,198.12 83.19,198.75
  Bottom 1.27: T1.E 85.09,200.66 83.19,198.75 82.98,198.55 arc45 82.91,203.45 82.91,203.2 | T2.E 105.24,200.83 104.09,200.83 101.6,203.32 101.03,203.32 99.56,204.78 99.56,206.83 | 147.32,227.33 147.04,227.33 arc-90 146.78,227.58 146.78,239.55 147.07,239.55 arc90 147.32,239.8 147.32,240.03
  Bottom 2.54: 147.32,226.06 arc90 147.2,225.94 147.2,224.53 151.91,224.53 arc-90 152.09,224.35 152.09,223.19 147.47,223.19 arc-90 147.38,223.28 arc90 147.29,223.19 147.29,221.68 152.1,221.68 arc-90 152.36,221.42 152.36,219.54 147.56,219.54 arc-90 147.38,219.72 arc-90 147.2,219.9 147.2,220.52 152.19,220.52 arc90 152.45,220.78 152.45,223.72 arc-90 152.36,223.81 152.36,224.44
  pour Bottom (isolate 0.61, rank 2): 80.01,187.96 157.48,187.96 157.48,246.38 80.01,246.38
GND1  (via drill 0.6)  (1 unrouted)
  Top 0.813: v20.32,217.17 v20.32,222.25 | v38.1,217.17 v38.1,222.25 | v55.88,217.17 v55.88,222.25
  Bottom 0.813: CN4.6 61.72,191.77 arc45 61.9,191.84 63.63,193.57 70.55,193.57 arc45 70.73,193.64 73.62,196.53 arc-45 73.62,196.53 74.18,197.09 74.18,200 arc45 74.1,200.18 73.68,200.6 67.99,200.6 arc45 67.81,200.53 67.51,200.23 61.49,200.23 arc-45 61.31,200.31 T8.E 57.15,200.66 54.61,203.2 54.61,207.01 55.88,208.28 v55.88,217.17 | 19.56,206.83 20.32,207.59 v20.32,217.17 | v20.32,222.25 20.32,223.52 19.05,222.25 16.51,222.25 15.24,220.98 15.24,212.09 13.44,212.09 12.46,211.11 11.85,211.11 11.57,210.83 10.84,210.83 10.41,210.4 9.45,210.4 9.09,210.77 9.09,211.29 8.26,212.12 8.26,215.07 8.38,215.19 8.38,217.86 8.2,218.05 8.2,220.41 7.62,220.98 2.54,220.98 2.54,203.56 2.9,203.2 | T7.E 41.91,200.66 38.1,204.47 v38.1,217.17 | v38.1,222.25 38.1,223.52 | v55.88,222.25 55.88,223.52 49.53,223.52 | 67.31,240.03 67.31,242.57 | 67.31,226.06 67.31,227.33
  Bottom 1.016: CN3.3 33.02,189.23 20.32,189.23 17.78,191.77 7.62,191.77 3.81,195.58 3.81,198.12 3.18,198.75
  Bottom 1.27: T5.E 5.08,200.66 3.18,198.75 2.97,198.55 arc45 2.9,203.45 2.9,203.2 | T6.E 25.23,200.83 24.08,200.83 21.59,203.32 21.02,203.32 19.56,204.78 19.56,206.83 | 67.31,227.33 67.03,227.33 arc-90 66.77,227.58 66.77,239.55 67.06,239.55 arc90 67.31,239.8 67.31,240.03
  Bottom 2.54: 67.31,226.06 arc90 67.2,225.94 67.2,224.53 71.9,224.53 arc-90 72.08,224.35 72.08,223.19 67.46,223.19 arc-90 67.37,223.28 arc90 67.28,223.19 67.28,221.68 72.09,221.68 arc-90 72.35,221.42 72.35,219.54 67.55,219.54 arc-90 67.37,219.72 arc-90 67.2,219.9 67.2,220.52 72.18,220.52 arc90 72.44,220.78 72.44,223.72 arc-90 72.35,223.81 72.35,224.44
  pour Bottom (isolate 0.61, rank 2): 0,187.96 77.47,187.96 77.47,246.38 0,246.38
GND2  (via drill 0.6)  (1 unrouted)
  Top 0.813: v20.32,153.67 v20.32,158.75 | v38.1,153.67 v38.1,158.75 | v55.88,153.67 v55.88,158.75
  Bottom 0.813: CN6.6 61.72,128.27 arc45 61.9,128.34 63.63,130.07 70.55,130.07 arc45 70.73,130.14 73.62,133.03 arc-45 73.62,133.03 74.18,133.59 74.18,136.5 arc45 74.1,136.68 73.68,137.1 67.99,137.1 arc45 67.81,137.03 67.51,136.73 61.49,136.73 arc-45 61.31,136.81 T12.E 57.15,137.16 54.61,139.7 54.61,143.51 55.88,144.78 v55.88,153.67 | 19.56,143.33 20.32,144.09 v20.32,153.67 | v20.32,158.75 20.32,160.02 19.05,158.75 16.51,158.75 15.24,157.48 15.24,148.59 13.44,148.59 12.46,147.61 11.85,147.61 11.57,147.33 10.84,147.33 10.41,146.9 9.45,146.9 9.09,147.27 9.09,147.79 8.26,148.62 8.26,151.57 8.38,151.69 8.38,154.36 8.2,154.55 8.2,156.91 7.62,157.48 2.54,157.48 2.54,140.06 2.9,139.7 | T11.E 41.91,137.16 38.1,140.97 v38.1,153.67 | v38.1,158.75 38.1,160.02 | v55.88,158.75 55.88,160.02 49.53,160.02 | 67.31,176.53 67.31,179.07 | 67.31,162.56 67.31,163.83
  Bottom 1.016: CN5.3 33.02,125.73 20.32,125.73 17.78,128.27 7.62,128.27 3.81,132.08 3.81,134.62 3.18,135.25
  Bottom 1.27: T9.E 5.08,137.16 3.18,135.25 2.97,135.05 arc45 2.9,139.95 2.9,139.7 | T10.E 25.23,137.33 24.08,137.33 21.59,139.82 21.02,139.82 19.56,141.29 19.56,143.33 | 67.31,163.83 67.03,163.83 arc-90 66.77,164.08 66.77,176.05 67.06,176.05 arc90 67.31,176.3 67.31,176.53
  Bottom 2.54: 67.31,162.56 arc90 67.2,162.44 67.2,161.03 71.9,161.03 arc-90 72.08,160.85 72.08,159.69 67.46,159.69 arc-90 67.37,159.78 arc90 67.28,159.69 67.28,158.18 72.09,158.18 arc-90 72.35,157.92 72.35,156.04 67.55,156.04 arc-90 67.37,156.22 arc-90 67.2,156.4 67.2,157.02 72.18,157.02 arc90 72.44,157.28 72.44,160.22 arc-90 72.35,160.31 72.35,160.94
  pour Bottom (isolate 0.61, rank 2): 0,124.46 77.47,124.46 77.47,182.88 0,182.88
GND3  (via drill 0.6)  (1 unrouted)
  Top 0.813: v100.33,153.67 v100.33,158.75 | v118.11,153.67 v118.11,158.75 | v135.89,153.67 v135.89,158.75
  Bottom 0.813: CN8.6 141.73,128.27 arc45 141.91,128.34 143.64,130.07 150.56,130.07 arc45 150.74,130.14 153.63,133.03 arc-45 153.63,133.03 154.19,133.59 154.19,136.5 arc45 154.11,136.68 153.69,137.1 148,137.1 arc45 147.82,137.03 147.52,136.73 141.5,136.73 arc-45 141.32,136.81 T16.E 137.16,137.16 134.62,139.7 134.62,143.51 135.89,144.78 v135.89,153.67 | 99.56,143.33 100.33,144.09 v100.33,153.67 | v100.33,158.75 100.33,160.02 99.06,158.75 96.52,158.75 95.25,157.48 95.25,148.59 93.45,148.59 92.47,147.61 91.86,147.61 91.58,147.33 90.84,147.33 90.42,146.9 89.46,146.9 89.09,147.27 89.09,147.79 88.27,148.62 88.27,151.57 88.39,151.69 88.39,154.36 88.21,154.55 88.21,156.91 87.63,157.48 82.55,157.48 82.55,140.06 82.91,139.7 | T15.E 121.92,137.16 118.11,140.97 v118.11,153.67 | v118.11,158.75 118.11,160.02 | v135.89,158.75 135.89,160.02 129.54,160.02 | 147.32,176.53 147.32,179.07 | 147.32,162.56 147.32,163.83
  Bottom 1.016: CN7.3 113.03,125.73 100.33,125.73 97.79,128.27 87.63,128.27 83.82,132.08 83.82,134.62 83.19,135.25
  Bottom 1.27: T13.E 85.09,137.16 83.19,135.25 82.98,135.05 arc45 82.91,139.95 82.91,139.7 | T14.E 105.24,137.33 104.09,137.33 101.6,139.82 101.03,139.82 99.56,141.29 99.56,143.33 | 147.32,163.83 147.04,163.83 arc-90 146.78,164.08 146.78,176.05 147.07,176.05 arc90 147.32,176.3 147.32,176.53
  Bottom 2.54: 147.32,162.56 arc90 147.2,162.44 147.2,161.03 151.91,161.03 arc-90 152.09,160.85 152.09,159.69 147.47,159.69 arc-90 147.38,159.78 arc90 147.29,159.69 147.29,158.18 152.1,158.18 arc-90 152.36,157.92 152.36,156.04 147.56,156.04 arc-90 147.38,156.22 arc-90 147.2,156.4 147.2,157.02 152.19,157.02 arc90 152.45,157.28 152.45,160.22 arc-90 152.36,160.31 152.36,160.94
  pour Bottom (isolate 0.61, rank 2): 80.01,124.46 157.48,124.46 157.48,182.88 80.01,182.88
GND4  (via drill 0.6)  (1 unrouted)
  Top 0.813: v20.32,90.17 v20.32,95.25 | v38.1,90.17 v38.1,95.25 | v55.88,90.17 v55.88,95.25
  Bottom 0.813: CN10.6 61.72,64.77 arc45 61.9,64.84 63.63,66.57 70.55,66.57 arc45 70.73,66.64 73.62,69.53 arc-45 73.62,69.53 74.18,70.09 74.18,73 arc45 74.1,73.18 73.68,73.6 67.99,73.6 arc45 67.81,73.53 67.51,73.23 61.49,73.23 arc-45 61.31,73.31 T20.E 57.15,73.66 54.61,76.2 54.61,80.01 55.88,81.28 v55.88,90.17 | 19.56,79.83 20.32,80.59 v20.32,90.17 | v20.32,95.25 20.32,96.52 19.05,95.25 16.51,95.25 15.24,93.98 15.24,85.09 13.44,85.09 12.46,84.11 11.85,84.11 11.57,83.83 10.84,83.83 10.41,83.4 9.45,83.4 9.09,83.77 9.09,84.29 8.26,85.12 8.26,88.07 8.38,88.19 8.38,90.86 8.2,91.05 8.2,93.41 7.62,93.98 2.54,93.98 2.54,76.56 2.9,76.2 | T19.E 41.91,73.66 38.1,77.47 v38.1,90.17 | v38.1,95.25 38.1,96.52 | v55.88,95.25 55.88,96.52 49.53,96.52 | 67.31,113.03 67.31,115.57 | 67.31,99.06 67.31,100.33
  Bottom 1.016: CN9.3 33.02,62.23 20.32,62.23 17.78,64.77 7.62,64.77 3.81,68.58 3.81,71.12 3.18,71.76
  Bottom 1.27: T17.E 5.08,73.66 3.18,71.76 2.97,71.55 arc45 2.9,76.45 2.9,76.2 | T18.E 25.23,73.83 24.08,73.83 21.59,76.32 21.02,76.32 19.56,77.79 19.56,79.83 | 67.31,100.33 67.03,100.33 arc-90 66.77,100.58 66.77,112.55 67.06,112.55 arc90 67.31,112.8 67.31,113.03
  Bottom 2.54: 67.31,99.06 arc90 67.2,98.95 67.2,97.53 71.9,97.53 arc-90 72.08,97.35 72.08,96.19 67.46,96.19 arc-90 67.37,96.28 arc90 67.28,96.19 67.28,94.68 72.09,94.68 arc-90 72.35,94.42 72.35,92.54 67.55,92.54 arc-90 67.37,92.72 arc-90 67.2,92.9 67.2,93.52 72.18,93.52 arc90 72.44,93.78 72.44,96.72 arc-90 72.35,96.81 72.35,97.44
  pour Bottom (isolate 0.61, rank 2): 0,60.96 77.47,60.96 77.47,119.38 0,119.38
GND5  (via drill 0.6)  (1 unrouted)
  Top 0.813: v100.33,90.17 v100.33,95.25 | v118.11,90.17 v118.11,95.25 | v135.89,90.17 v135.89,95.25
  Bottom 0.813: CN12.6 141.73,64.77 arc45 141.91,64.84 143.64,66.57 150.56,66.57 arc45 150.74,66.64 153.63,69.53 arc-45 153.63,69.53 154.19,70.09 154.19,73 arc45 154.11,73.18 153.69,73.6 148,73.6 arc45 147.82,73.53 147.52,73.23 141.5,73.23 arc-45 141.32,73.31 T24.E 137.16,73.66 134.62,76.2 134.62,80.01 135.89,81.28 v135.89,90.17 | 99.56,79.83 100.33,80.59 v100.33,90.17 | v100.33,95.25 100.33,96.52 99.06,95.25 96.52,95.25 95.25,93.98 95.25,85.09 93.45,85.09 92.47,84.11 91.86,84.11 91.58,83.83 90.84,83.83 90.42,83.4 89.46,83.4 89.09,83.77 89.09,84.29 88.27,85.12 88.27,88.07 88.39,88.19 88.39,90.86 88.21,91.05 88.21,93.41 87.63,93.98 82.55,93.98 82.55,76.56 82.91,76.2 | T23.E 121.92,73.66 118.11,77.47 v118.11,90.17 | v118.11,95.25 118.11,96.52 | v135.89,95.25 135.89,96.52 129.54,96.52 | 147.32,113.03 147.32,115.57 | 147.32,99.06 147.32,100.33
  Bottom 1.016: CN11.3 113.03,62.23 100.33,62.23 97.79,64.77 87.63,64.77 83.82,68.58 83.82,71.12 83.19,71.76
  Bottom 1.27: T21.E 85.09,73.66 83.19,71.76 82.98,71.55 arc45 82.91,76.45 82.91,76.2 | T22.E 105.24,73.83 104.09,73.83 101.6,76.32 101.03,76.32 99.56,77.79 99.56,79.83 | 147.32,100.33 147.04,100.33 arc-90 146.78,100.58 146.78,112.55 147.07,112.55 arc90 147.32,112.8 147.32,113.03
  Bottom 2.54: 147.32,99.06 arc90 147.2,98.95 147.2,97.53 151.91,97.53 arc-90 152.09,97.35 152.09,96.19 147.47,96.19 arc-90 147.38,96.28 arc90 147.29,96.19 147.29,94.68 152.1,94.68 arc-90 152.36,94.42 152.36,92.54 147.56,92.54 arc-90 147.38,92.72 arc-90 147.2,92.9 147.2,93.52 152.19,93.52 arc90 152.45,93.78 152.45,96.72 arc-90 152.36,96.81 152.36,97.44
  pour Bottom (isolate 0.61, rank 2): 80.01,60.96 157.48,60.96 157.48,119.38 80.01,119.38
GND6  (via drill 0.6)  (1 unrouted)
  Top 0.813: v20.32,29.21 v20.32,34.29 | v38.1,29.21 v38.1,34.29 | v55.88,29.21 v55.88,34.29
  Bottom 0.813: CN14.6 61.72,3.81 arc45 61.9,3.88 63.63,5.61 70.55,5.61 arc45 70.73,5.68 73.62,8.57 arc-45 73.62,8.57 74.18,9.12 74.18,12.04 arc45 74.1,12.22 73.68,12.64 67.99,12.64 arc45 67.81,12.57 67.51,12.27 61.49,12.27 arc-45 61.31,12.35 T28.E 57.15,12.7 54.61,15.24 54.61,19.05 55.88,20.32 v55.88,29.21 | 19.56,18.87 20.32,19.63 v20.32,29.21 | v20.32,34.29 20.32,35.56 19.05,34.29 16.51,34.29 15.24,33.02 15.24,24.13 13.44,24.13 12.46,23.15 11.85,23.15 11.57,22.87 10.84,22.87 10.41,22.44 9.45,22.44 9.09,22.81 9.09,23.33 8.26,24.16 8.26,27.11 8.38,27.23 8.38,29.9 8.2,30.09 8.2,32.45 7.62,33.02 2.54,33.02 2.54,15.6 2.9,15.24 | T27.E 41.91,12.7 38.1,16.51 v38.1,29.21 | v38.1,34.29 38.1,35.56 | v55.88,34.29 55.88,35.56 49.53,35.56 | 67.31,52.07 67.31,54.61 | 67.31,38.1 67.31,39.37
  Bottom 1.016: CN13.3 33.02,1.27 20.32,1.27 17.78,3.81 7.62,3.81 3.81,7.62 3.81,10.16 3.18,10.8
  Bottom 1.27: T25.E 5.08,12.7 3.18,10.8 2.97,10.59 arc45 2.9,15.49 2.9,15.24 | T26.E 25.23,12.87 24.08,12.87 21.59,15.36 21.02,15.36 19.56,16.83 19.56,18.87 | 67.31,39.37 67.03,39.37 arc-90 66.77,39.62 66.77,51.59 67.06,51.59 arc90 67.31,51.84 67.31,52.07
  Bottom 2.54: 67.31,38.1 arc90 67.2,37.99 67.2,36.56 71.9,36.56 arc-90 72.08,36.39 72.08,35.23 67.46,35.23 arc-90 67.37,35.32 arc90 67.28,35.23 67.28,33.72 72.09,33.72 arc-90 72.35,33.46 72.35,31.58 67.55,31.58 arc-90 67.37,31.76 arc-90 67.2,31.94 67.2,32.56 72.18,32.56 arc90 72.44,32.81 72.44,35.76 arc-90 72.35,35.85 72.35,36.48
  pour Bottom (isolate 0.61, rank 2): 0,0 77.47,0 77.47,58.42 0,58.42
GND7  (via drill 0.6)  (1 unrouted)
  Top 0.813: v100.33,29.21 v100.33,34.29 | v118.11,29.21 v118.11,34.29 | v135.89,29.21 v135.89,34.29
  Bottom 0.813: CN16.6 141.73,3.81 arc45 141.91,3.88 143.64,5.61 150.56,5.61 arc45 150.74,5.68 153.63,8.57 arc-45 153.63,8.57 154.19,9.12 154.19,12.04 arc45 154.11,12.22 153.69,12.64 148,12.64 arc45 147.82,12.57 147.52,12.27 141.5,12.27 arc-45 141.32,12.35 T32.E 137.16,12.7 134.62,15.24 134.62,19.05 135.89,20.32 v135.89,29.21 | 99.56,18.87 100.33,19.63 v100.33,29.21 | v100.33,34.29 100.33,35.56 99.06,34.29 96.52,34.29 95.25,33.02 95.25,24.13 93.45,24.13 92.47,23.15 91.86,23.15 91.58,22.87 90.84,22.87 90.42,22.44 89.46,22.44 89.09,22.81 89.09,23.33 88.27,24.16 88.27,27.11 88.39,27.23 88.39,29.9 88.21,30.09 88.21,32.45 87.63,33.02 82.55,33.02 82.55,15.6 82.91,15.24 | T31.E 121.92,12.7 118.11,16.51 v118.11,29.21 | v118.11,34.29 118.11,35.56 | v135.89,34.29 135.89,35.56 129.54,35.56 | 147.32,52.07 147.32,54.61 | 147.32,38.1 147.32,39.37
  Bottom 1.016: CN15.3 113.03,1.27 100.33,1.27 97.79,3.81 87.63,3.81 83.82,7.62 83.82,10.16 83.19,10.8
  Bottom 1.27: T29.E 85.09,12.7 83.19,10.8 82.98,10.59 arc45 82.91,15.49 82.91,15.24 | T30.E 105.24,12.87 104.09,12.87 101.6,15.36 101.03,15.36 99.56,16.83 99.56,18.87 | 147.32,39.37 147.04,39.37 arc-90 146.78,39.62 146.78,51.59 147.07,51.59 arc90 147.32,51.84 147.32,52.07
  Bottom 2.54: 147.32,38.1 arc90 147.2,37.99 147.2,36.56 151.91,36.56 arc-90 152.09,36.39 152.09,35.23 147.47,35.23 arc-90 147.38,35.32 arc90 147.29,35.23 147.29,33.72 152.1,33.72 arc-90 152.36,33.46 152.36,31.58 147.56,31.58 arc-90 147.38,31.76 arc-90 147.2,31.94 147.2,32.56 152.19,32.56 arc90 152.45,32.81 152.45,35.76 arc-90 152.36,35.85 152.36,36.48
  pour Bottom (isolate 0.61, rank 2): 80.01,0 157.48,0 157.48,58.42 80.01,58.42
IN-1
  Bottom 0.813: D5.K 100.23,198.12 arc-45 100.4,198.05 102.24,196.22 116.1,196.22 arc-45 116.28,196.14 117.48,194.95 128.17,194.95 arc-45 128.34,194.87 128.91,194.31 128.91,192.51 arc45 128.98,192.33 CN2.2
IN-2
  Bottom 0.813: D3.K 119.38,196.22 130.71,196.22 arc-45 130.88,196.14 132.08,194.95 CN2.3
IN-3
  Bottom 0.813: D6.K CN2.4
IN-4
  Bottom 0.813: CN2.5 137.16,192.94 arc-45 137.23,193.11 139.7,195.58 149.75,195.58 arc45 149.93,195.65 D8.K
IN-5
  Bottom 0.813: D13.K 20.22,198.12 arc-45 20.39,198.05 22.23,196.22 36.09,196.22 arc-45 36.27,196.14 37.47,194.95 48.16,194.95 arc-45 48.33,194.87 48.9,194.31 48.9,192.51 arc45 48.97,192.33 CN4.2
IN-6
  Bottom 0.813: D11.K 39.37,196.22 50.7,196.22 arc-45 50.87,196.14 52.07,194.95 CN4.3
IN-7
  Bottom 0.813: D14.K CN4.4
IN-8
  Bottom 0.813: CN4.5 57.15,192.94 arc-45 57.22,193.11 59.69,195.58 69.75,195.58 arc45 69.92,195.65 D16.K
IN-9
  Bottom 0.813: D21.K 20.22,134.62 arc-45 20.39,134.55 22.23,132.72 36.09,132.72 arc-45 36.27,132.64 37.47,131.44 48.16,131.44 arc-45 48.33,131.37 48.9,130.81 48.9,129.01 arc45 48.97,128.83 CN6.2
IN-10
  Bottom 0.813: D19.K 39.37,132.72 50.7,132.72 arc-45 50.87,132.64 52.07,131.44 CN6.3
IN-11
  Bottom 0.813: D22.K CN6.4
IN-12
  Bottom 0.813: CN6.5 57.15,129.44 arc-45 57.22,129.61 59.69,132.08 69.75,132.08 arc45 69.92,132.15 D24.K
IN-13
  Bottom 0.813: D29.K 100.23,134.62 arc-45 100.4,134.55 102.24,132.72 116.1,132.72 arc-45 116.28,132.64 117.48,131.44 128.17,131.44 arc-45 128.34,131.37 128.91,130.81 128.91,129.01 arc45 128.98,128.83 CN8.2
IN-14
  Bottom 0.813: D27.K 119.38,132.72 130.71,132.72 arc-45 130.88,132.64 132.08,131.44 CN8.3
IN-15
  Bottom 0.813: D30.K CN8.4
IN-16
  Bottom 0.813: CN8.5 137.16,129.44 arc-45 137.23,129.61 139.7,132.08 149.75,132.08 arc45 149.93,132.15 D32.K
IN-17
  Bottom 0.813: D37.K 20.22,71.12 arc-45 20.39,71.05 22.23,69.22 36.09,69.22 arc-45 36.27,69.14 37.47,67.95 48.16,67.95 arc-45 48.33,67.87 48.9,67.31 48.9,65.51 arc45 48.97,65.33 CN10.2
IN-18
  Bottom 0.813: D35.K 39.37,69.22 50.7,69.22 arc-45 50.87,69.14 52.07,67.95 CN10.3
IN-19
  Bottom 0.813: D38.K CN10.4
IN-20
  Bottom 0.813: CN10.5 57.15,65.94 arc-45 57.22,66.11 59.69,68.58 69.75,68.58 arc45 69.92,68.65 D40.K
IN-21
  Bottom 0.813: D45.K 100.23,71.12 arc-45 100.4,71.05 102.24,69.22 116.1,69.22 arc-45 116.28,69.14 117.48,67.95 128.17,67.95 arc-45 128.34,67.87 128.91,67.31 128.91,65.51 arc45 128.98,65.33 CN12.2
IN-22
  Bottom 0.813: D43.K 119.38,69.22 130.71,69.22 arc-45 130.88,69.14 132.08,67.95 CN12.3
IN-23
  Bottom 0.813: D46.K CN12.4
IN-24
  Bottom 0.813: CN12.5 137.16,65.94 arc-45 137.23,66.11 139.7,68.58 149.75,68.58 arc45 149.93,68.65 D48.K
IN-25
  Bottom 0.813: D53.K 20.22,10.16 arc-45 20.39,10.09 22.23,8.25 36.09,8.25 arc-45 36.27,8.18 37.47,6.99 48.16,6.99 arc-45 48.33,6.91 48.9,6.35 48.9,4.55 arc45 48.97,4.37 CN14.2
IN-26
  Bottom 0.813: D51.K 39.37,8.25 50.7,8.25 arc-45 50.87,8.18 52.07,6.99 CN14.3
IN-27
  Bottom 0.813: D54.K CN14.4
IN-28
  Bottom 0.813: CN14.5 57.15,4.97 arc-45 57.22,5.15 59.69,7.62 69.75,7.62 arc45 69.92,7.69 D56.K
IN-29
  Bottom 0.813: D61.K 100.23,10.16 arc-45 100.4,10.09 102.24,8.25 116.1,8.25 arc-45 116.28,8.18 117.48,6.99 128.17,6.99 arc-45 128.34,6.91 128.91,6.35 128.91,4.55 arc45 128.98,4.37 CN16.2
IN-30
  Bottom 0.813: D59.K 119.38,8.25 130.71,8.25 arc-45 130.88,8.18 132.08,6.99 CN16.3
IN-31
  Bottom 0.813: D62.K CN16.4
IN-32
  Bottom 0.813: CN16.5 137.16,4.97 arc-45 137.23,5.15 139.7,7.62 149.75,7.62 arc45 149.93,7.69 D64.K
JD-VCC
  Bottom 0.61: CN1.2 110.49,192.97 111.1,193.58 111.13,193.58 111.47,193.92 115.12,193.92 116.14,192.9 116.14,192.81 116.44,192.5 122.86,192.5 122.92,192.44 123.07,192.44 124.12,191.4 124.15,191.4 124.88,190.66 124.88,189.96 125.1,189.74 141.95,189.74 142.04,189.83 142.35,189.83 144.47,191.95 144.5,191.95 144.87,192.32 151.31,192.32 151.56,192.56 151.56,192.57 155.36,196.37 155.36,201.13 155.3,201.19 155.3,203.74 154.04,205 150.79,208.25 150.76,208.25 150.36,208.65 150.21,208.65 149.87,208.99 D7.C
  Bottom 1.27: K4.1 150.9,216.03 arc-45 151.08,215.95 151.13,215.9 151.13,210.93 arc-45 151.06,210.75 D7.C 146.05,209.55 144.85,208.35 arc45 144.78,208.18 | OC1.4 91.44,208.28 92.64,209.48 arc-45 92.81,209.55 D1.C 97.34,210.37 arc45 97.41,210.54 K1.1 97.72,216.33 arc45 97.79,216.51 97.79,218.44 98.99,219.64 arc-45 99.17,219.71 105.41,219.71 106.61,218.51 arc-45 106.68,218.34 106.68,210.82 109.15,208.35 arc-45 109.22,208.18 | 109.22,208.18 arc-45 109.29,208.35 110.49,209.55 D2.C 115.12,210.37 arc45 115.19,210.54 K2.1 115.24,215.97 arc45 115.42,215.9 115.57,215.9 115.57,218.44 116.77,219.64 arc-45 116.95,219.71 123.19,219.71 124.39,218.51 arc-45 124.46,218.34 124.46,210.82 126.93,208.35 arc-45 127,208.18 | OC2.4 109.22,208.18 | OC3.4 127,208.18 | 127,208.18 arc-45 127.07,208.35 128.27,209.55 D4.C 132.9,210.37 arc45 132.97,210.54 K3.1 133.12,216.03 arc-45 133.3,215.95 133.35,215.9 133.35,218.44 134.62,219.71 140.97,219.71 142.17,218.51 arc-45 142.24,218.34 142.24,212.09 144.71,209.62 arc-45 144.78,209.44 144.78,208.18 | OC4.4 144.78,208.18
JD-VCC1
  Bottom 0.61: CN3.2 30.48,192.97 31.09,193.58 31.12,193.58 31.46,193.92 35.11,193.92 36.13,192.9 36.13,192.81 36.43,192.5 42.85,192.5 42.91,192.44 43.06,192.44 44.11,191.4 44.14,191.4 44.87,190.66 44.87,189.96 45.09,189.74 61.94,189.74 62.03,189.83 62.34,189.83 64.46,191.95 64.49,191.95 64.86,192.32 71.3,192.32 71.55,192.56 71.55,192.57 75.35,196.37 75.35,201.13 75.29,201.19 75.29,203.74 74.03,205 70.78,208.25 70.75,208.25 70.35,208.65 70.2,208.65 69.86,208.99 D15.C
  Bottom 1.27: K8.1 70.89,216.03 arc-45 71.07,215.95 71.12,215.9 71.12,210.93 arc-45 71.05,210.75 D15.C 66.04,209.55 64.84,208.35 arc45 64.77,208.18 | OC5.4 11.43,208.28 12.63,209.48 arc-45 12.81,209.55 D9.C 17.33,210.37 arc45 17.4,210.54 K5.1 17.71,216.33 arc45 17.78,216.51 17.78,218.44 18.98,219.64 arc-45 19.16,219.71 25.4,219.71 26.6,218.51 arc-45 26.67,218.34 26.67,210.82 29.14,208.35 arc-45 29.21,208.18 | 29.21,208.18 arc-45 29.28,208.35 30.48,209.55 D10.C 35.11,210.37 arc45 35.18,210.54 K6.1 35.23,215.97 arc45 35.41,215.9 35.56,215.9 35.56,218.44 36.76,219.64 arc-45 36.94,219.71 43.18,219.71 44.38,218.51 arc-45 44.45,218.34 44.45,210.82 46.92,208.35 arc-45 46.99,208.18 | OC6.4 29.21,208.18 | OC7.4 46.99,208.18 | 46.99,208.18 arc-45 47.06,208.35 48.26,209.55 D12.C 52.89,210.37 arc45 52.96,210.54 K7.1 53.11,216.03 arc-45 53.29,215.95 53.34,215.9 53.34,218.44 54.61,219.71 60.96,219.71 62.16,218.51 arc-45 62.23,218.34 62.23,212.09 64.7,209.62 arc-45 64.77,209.44 64.77,208.18 | OC8.4 64.77,208.18
JD-VCC2
  Bottom 0.61: CN5.2 30.48,129.47 31.09,130.08 31.12,130.08 31.46,130.42 35.11,130.42 36.13,129.4 36.13,129.31 36.43,129 42.85,129 42.91,128.94 43.06,128.94 44.11,127.9 44.14,127.9 44.87,127.16 44.87,126.46 45.09,126.24 61.94,126.24 62.03,126.33 62.34,126.33 64.46,128.45 64.49,128.45 64.86,128.82 71.3,128.82 71.55,129.06 71.55,129.07 75.35,132.87 75.35,137.63 75.29,137.69 75.29,140.24 74.03,141.5 70.78,144.75 70.75,144.75 70.35,145.15 70.2,145.15 69.86,145.49 D23.C
  Bottom 1.27: K12.1 70.89,152.53 arc-45 71.07,152.45 71.12,152.4 71.12,147.43 arc-45 71.05,147.25 D23.C 66.04,146.05 64.84,144.85 arc45 64.77,144.68 | OC9.4 11.43,144.78 12.63,145.98 arc-45 12.81,146.05 D17.C 17.33,146.87 arc45 17.4,147.04 K9.1 17.71,152.83 arc45 17.78,153.01 17.78,154.94 18.98,156.14 arc-45 19.16,156.21 25.4,156.21 26.6,155.01 arc-45 26.67,154.84 26.67,147.32 29.14,144.85 arc-45 29.21,144.68 | 29.21,144.68 arc-45 29.28,144.85 30.48,146.05 D18.C 35.11,146.87 arc45 35.18,147.04 K10.1 35.23,152.47 arc45 35.41,152.4 35.56,152.4 35.56,154.94 36.76,156.14 arc-45 36.94,156.21 43.18,156.21 44.38,155.01 arc-45 44.45,154.84 44.45,147.32 46.92,144.85 arc-45 46.99,144.68 | OC10.4 29.21,144.68 | OC11.4 46.99,144.68 | 46.99,144.68 arc-45 47.06,144.85 48.26,146.05 D20.C 52.89,146.87 arc45 52.96,147.04 K11.1 53.11,152.53 arc-45 53.29,152.45 53.34,152.4 53.34,154.94 54.61,156.21 60.96,156.21 62.16,155.01 arc-45 62.23,154.84 62.23,148.59 64.7,146.12 arc-45 64.77,145.94 64.77,144.68 | OC12.4 64.77,144.68
JD-VCC3
  Bottom 0.61: CN7.2 110.49,129.47 111.1,130.08 111.13,130.08 111.47,130.42 115.12,130.42 116.14,129.4 116.14,129.31 116.44,129 122.86,129 122.92,128.94 123.07,128.94 124.12,127.9 124.15,127.9 124.88,127.16 124.88,126.46 125.1,126.24 141.95,126.24 142.04,126.33 142.35,126.33 144.47,128.45 144.5,128.45 144.87,128.82 151.31,128.82 151.56,129.06 151.56,129.07 155.36,132.87 155.36,137.63 155.3,137.69 155.3,140.24 154.04,141.5 150.79,144.75 150.76,144.75 150.36,145.15 150.21,145.15 149.87,145.49 D31.C
  Bottom 1.27: K16.1 150.9,152.53 arc-45 151.08,152.45 151.13,152.4 151.13,147.43 arc-45 151.06,147.25 D31.C 146.05,146.05 144.85,144.85 arc45 144.78,144.68 | OC13.4 91.44,144.78 92.64,145.98 arc-45 92.81,146.05 D25.C 97.34,146.87 arc45 97.41,147.04 K13.1 97.72,152.83 arc45 97.79,153.01 97.79,154.94 98.99,156.14 arc-45 99.17,156.21 105.41,156.21 106.61,155.01 arc-45 106.68,154.84 106.68,147.32 109.15,144.85 arc-45 109.22,144.68 | 109.22,144.68 arc-45 109.29,144.85 110.49,146.05 D26.C 115.12,146.87 arc45 115.19,147.04 K14.1 115.24,152.47 arc45 115.42,152.4 115.57,152.4 115.57,154.94 116.77,156.14 arc-45 116.95,156.21 123.19,156.21 124.39,155.01 arc-45 124.46,154.84 124.46,147.32 126.93,144.85 arc-45 127,144.68 | OC14.4 109.22,144.68 | OC15.4 127,144.68 | 127,144.68 arc-45 127.07,144.85 128.27,146.05 D28.C 132.9,146.87 arc45 132.97,147.04 K15.1 133.12,152.53 arc-45 133.3,152.45 133.35,152.4 133.35,154.94 134.62,156.21 140.97,156.21 142.17,155.01 arc-45 142.24,154.84 142.24,148.59 144.71,146.12 arc-45 144.78,145.94 144.78,144.68 | OC16.4 144.78,144.68
JD-VCC4
  Bottom 0.61: CN9.2 30.48,65.97 31.09,66.58 31.12,66.58 31.46,66.92 35.11,66.92 36.13,65.9 36.13,65.81 36.43,65.5 42.85,65.5 42.91,65.44 43.06,65.44 44.11,64.4 44.14,64.4 44.87,63.66 44.87,62.96 45.09,62.74 61.94,62.74 62.03,62.83 62.34,62.83 64.46,64.95 64.49,64.95 64.86,65.32 71.3,65.32 71.55,65.57 75.35,69.37 75.35,74.13 75.29,74.19 75.29,76.74 74.03,78 70.78,81.25 70.75,81.25 70.35,81.65 70.2,81.65 69.86,81.99 D39.C
  Bottom 1.27: K20.1 70.89,89.03 arc-45 71.07,88.95 71.12,88.9 71.12,83.93 arc-45 71.05,83.75 D39.C 66.04,82.55 64.84,81.35 arc45 64.77,81.18 | OC17.4 11.43,81.28 12.63,82.48 arc-45 12.81,82.55 D33.C 17.33,83.37 arc45 17.4,83.54 K17.1 17.71,89.33 arc45 17.78,89.51 17.78,91.44 18.98,92.64 arc-45 19.16,92.71 25.4,92.71 26.6,91.51 arc-45 26.67,91.34 26.67,83.82 29.14,81.35 arc-45 29.21,81.18 | 29.21,81.18 arc-45 29.28,81.35 30.48,82.55 D34.C 35.11,83.37 arc45 35.18,83.54 K18.1 35.23,88.97 arc45 35.41,88.9 35.56,88.9 35.56,91.44 36.76,92.64 arc-45 36.94,92.71 43.18,92.71 44.38,91.51 arc-45 44.45,91.34 44.45,83.82 46.92,81.35 arc-45 46.99,81.18 | OC18.4 29.21,81.18 | OC19.4 46.99,81.18 | 46.99,81.18 arc-45 47.06,81.35 48.26,82.55 D36.C 52.89,83.37 arc45 52.96,83.54 K19.1 53.11,89.03 arc-45 53.29,88.95 53.34,88.9 53.34,91.44 54.61,92.71 60.96,92.71 62.16,91.51 arc-45 62.23,91.34 62.23,85.09 64.7,82.62 arc-45 64.77,82.45 64.77,81.18 | OC20.4 64.77,81.18
JD-VCC5
  Bottom 0.61: CN11.2 110.49,65.97 111.1,66.58 111.13,66.58 111.47,66.92 115.12,66.92 116.14,65.9 116.14,65.81 116.44,65.5 122.86,65.5 122.92,65.44 123.07,65.44 124.12,64.4 124.15,64.4 124.88,63.66 124.88,62.96 125.1,62.74 141.95,62.74 142.04,62.83 142.35,62.83 144.47,64.95 144.5,64.95 144.87,65.32 151.31,65.32 151.56,65.57 155.36,69.37 155.36,74.13 155.3,74.19 155.3,76.74 154.04,78 150.79,81.25 150.76,81.25 150.36,81.65 150.21,81.65 149.87,81.99 D47.C
  Bottom 1.27: K24.1 150.9,89.03 arc-45 151.08,88.95 151.13,88.9 151.13,83.93 arc-45 151.06,83.75 D47.C 146.05,82.55 144.85,81.35 arc45 144.78,81.18 | OC21.4 91.44,81.28 92.64,82.48 arc-45 92.81,82.55 D41.C 97.34,83.37 arc45 97.41,83.54 K21.1 97.72,89.33 arc45 97.79,89.51 97.79,91.44 98.99,92.64 arc-45 99.17,92.71 105.41,92.71 106.61,91.51 arc-45 106.68,91.34 106.68,83.82 109.15,81.35 arc-45 109.22,81.18 | 109.22,81.18 arc-45 109.29,81.35 110.49,82.55 D42.C 115.12,83.37 arc45 115.19,83.54 K22.1 115.24,88.97 arc45 115.42,88.9 115.57,88.9 115.57,91.44 116.77,92.64 arc-45 116.95,92.71 123.19,92.71 124.39,91.51 arc-45 124.46,91.34 124.46,83.82 126.93,81.35 arc-45 127,81.18 | OC22.4 109.22,81.18 | OC23.4 127,81.18 | 127,81.18 arc-45 127.07,81.35 128.27,82.55 D44.C 132.9,83.37 arc45 132.97,83.54 K23.1 133.12,89.03 arc-45 133.3,88.95 133.35,88.9 133.35,91.44 134.62,92.71 140.97,92.71 142.17,91.51 arc-45 142.24,91.34 142.24,85.09 144.71,82.62 arc-45 144.78,82.45 144.78,81.18 | OC24.4 144.78,81.18
JD-VCC6
  Bottom 0.61: CN13.2 30.48,5.01 31.09,5.62 31.12,5.62 31.46,5.96 35.11,5.96 36.13,4.94 36.13,4.85 36.43,4.54 42.85,4.54 42.91,4.48 43.06,4.48 44.11,3.44 44.14,3.44 44.87,2.7 44.87,2 45.09,1.78 61.94,1.78 62.03,1.87 62.34,1.87 64.46,3.99 64.49,3.99 64.86,4.36 71.3,4.36 71.55,4.61 75.35,8.41 75.35,13.17 75.29,13.23 75.29,15.78 74.03,17.04 70.78,20.29 70.75,20.29 70.35,20.69 70.2,20.69 69.86,21.03 D55.C
  Bottom 1.27: K28.1 70.89,28.07 arc-45 71.07,27.99 71.12,27.94 71.12,22.97 arc-45 71.05,22.79 D55.C 66.04,21.59 64.84,20.39 arc45 64.77,20.22 | OC25.4 11.43,20.32 12.63,21.52 arc-45 12.81,21.59 D49.C 17.33,22.41 arc45 17.4,22.58 K25.1 17.71,28.37 arc45 17.78,28.55 17.78,30.48 18.98,31.68 arc-45 19.16,31.75 25.4,31.75 26.6,30.55 arc-45 26.67,30.38 26.67,22.86 29.14,20.39 arc-45 29.21,20.22 | 29.21,20.22 arc-45 29.28,20.39 30.48,21.59 D50.C 35.11,22.41 arc45 35.18,22.58 K26.1 35.23,28.01 arc45 35.41,27.94 35.56,27.94 35.56,30.48 36.76,31.68 arc-45 36.94,31.75 43.18,31.75 44.38,30.55 arc-45 44.45,30.38 44.45,22.86 46.92,20.39 arc-45 46.99,20.22 | OC26.4 29.21,20.22 | OC27.4 46.99,20.22 | 46.99,20.22 arc-45 47.06,20.39 48.26,21.59 D52.C 52.89,22.41 arc45 52.96,22.58 K27.1 53.11,28.07 arc-45 53.29,27.99 53.34,27.94 53.34,30.48 54.61,31.75 60.96,31.75 62.16,30.55 arc-45 62.23,30.38 62.23,24.13 64.7,21.66 arc-45 64.77,21.49 64.77,20.22 | OC28.4 64.77,20.22
JD-VCC7
  Bottom 0.61: CN15.2 110.49,5.01 111.1,5.62 111.13,5.62 111.47,5.96 115.12,5.96 116.14,4.94 116.14,4.85 116.44,4.54 122.86,4.54 122.92,4.48 123.07,4.48 124.12,3.44 124.15,3.44 124.88,2.7 124.88,2 125.1,1.78 141.95,1.78 142.04,1.87 142.35,1.87 144.47,3.99 144.5,3.99 144.87,4.36 151.31,4.36 151.56,4.61 155.36,8.41 155.36,13.17 155.3,13.23 155.3,15.78 154.04,17.04 150.79,20.29 150.76,20.29 150.36,20.69 150.21,20.69 149.87,21.03 D63.C